# Altium PCB main_old.PcbDoc (part 4 of 15)
Units mil, origin at the board's own origin, x right, y up, seen from the top; angles counter-clockwise.
Board outline 8394.55 x 5164.44 mil, 7 copper layers (Top Layer 1, Layer 2, Layer 3, Unused, Layer 4_pow, Layer 5_gnd, Bottom 6+gnd), stack 46.112 mil thick; 363 components, 409 nets, 1750 pads, 991 vias.
Unrouted connection lines stored in the file: 1.
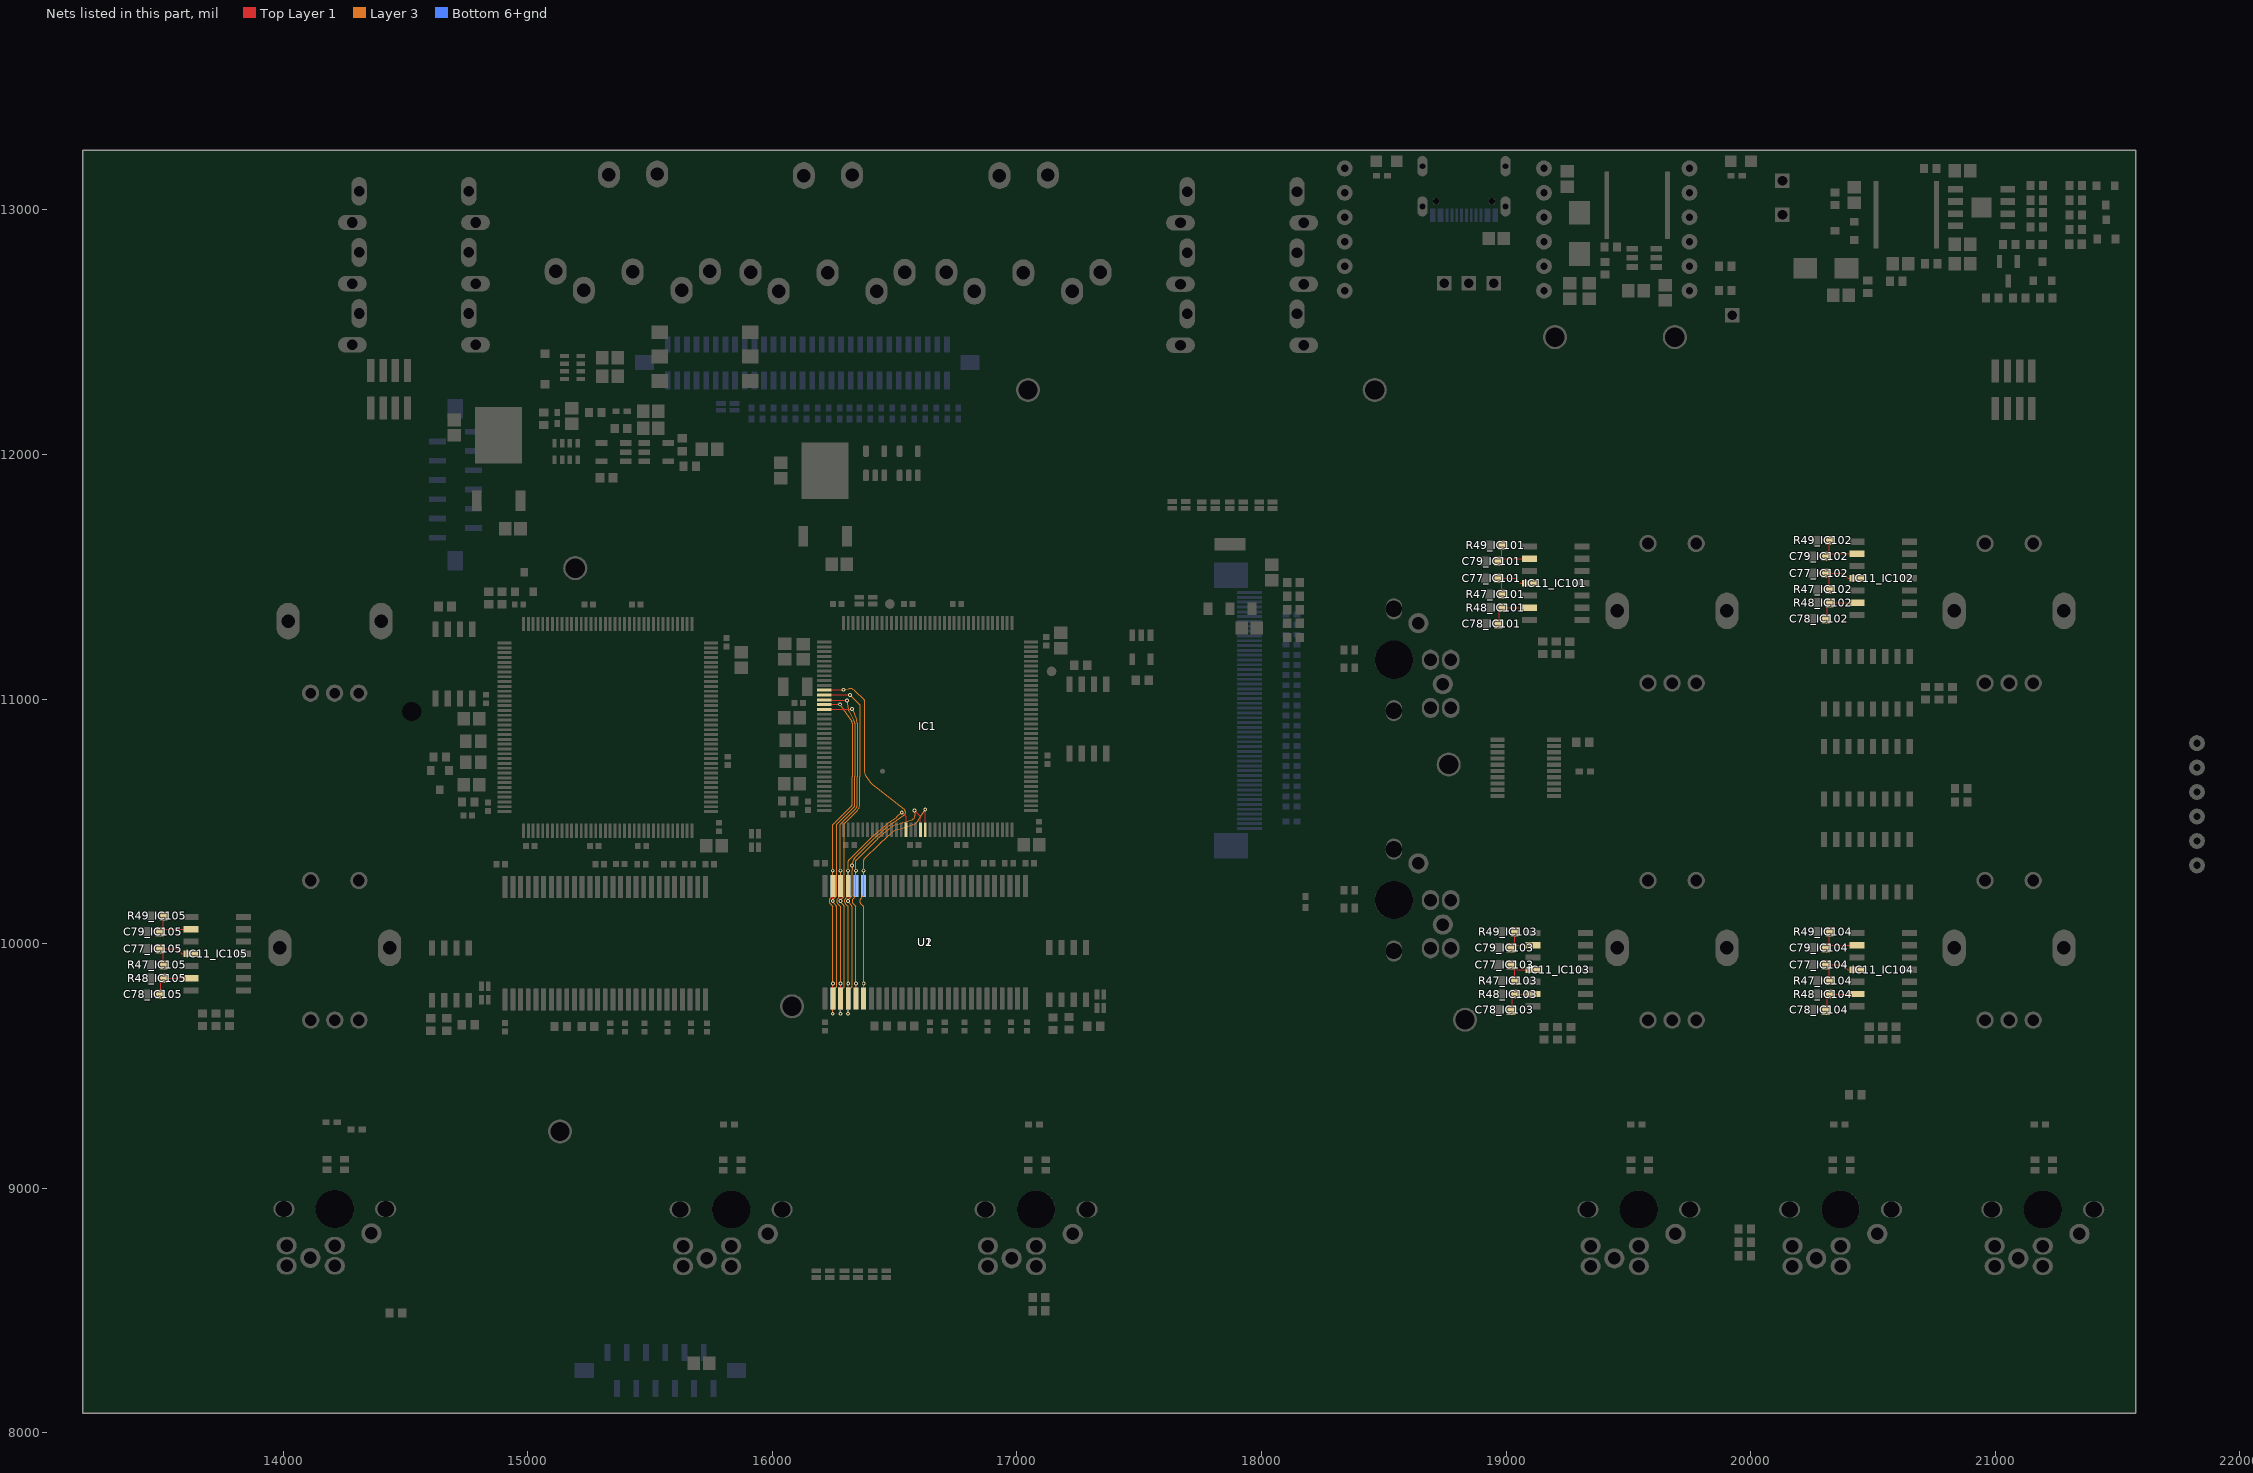
[diagram p7: the nets of this part, all layers, seen from the top]

## Via types
v1: diameter 15.75, hole 7.87, Top Layer 1 to Bottom 6+gnd, tented both sides, 923 vias
v2: diameter 27.56, hole 11.81, Top Layer 1 to Bottom 6+gnd, 45 vias
v3: diameter 23.62/23.62/23.62/23.62/23.62/23.62/23.62 (per signal layer), hole 12, Top Layer 1 to Bottom 6+gnd, tented top, 10 vias
v4: diameter 15.75, hole 7.87, Top Layer 1 to Bottom 6+gnd, 10 vias
v5: diameter 23.62/23.62/23.62/23.62/23.62/23.62/23.62 (per signal layer), hole 12, Top Layer 1 to Bottom 6+gnd, tented bottom, 3 vias

## Nets (pads, with @x,y where several pads share a name; then routed paths per layer and width w, separated by ;. In a path a pad name is that pad's centre, name@x,y a point inside that pad or via, vN(x,y) a via of type N, cw(c..) or ccw(c..) an arc to the next point about the centre after c; other vN are vias at no path point) (continued)
A1: IC1.11 U1.24 U2.24 | length 2953.5
  Top Layer 1 w5: IC1.11@16212.4,11036.61 16213.06,11037.27 16289.38,11037.27 v1(16290.2,11038.08) ; v1(16309.79,10174.13) U1.24@16309.79,10235.97
  Layer 3 w5: v1(16290.2,11038.08) 16312.52,11042.16 ; v1(16309.79,9713.5) 16309.79,9805.11 cw(c16314.8,9805.12) 16311.24,9808.63 16324.46,9821.89 ; v1(16309.79,10174.13) ccw(c16313.95,10176.92) 16309.88,10174.01 16324.99,10152.83 ; v1@16309.79,10179.83 16309.79,10179.7 cw(c16313.95,10176.92) 16310.38,10180.41 16324.46,10194.54 ; v1(16325.63,10320.11) 16325.92,10302.31 ; 16325.92,9825.38 16325.92,10149.97 ; 16335.67,10348.82 ccw(c16346.29,10338.23) 16331.89,10342.41 v1@16325.83,10321.55 ; 16335.68,10348.83 16419.34,10432.49 ; 16376.44,10994.71 16376.47,10700.78 ; 16312.52,11042.16 cw(c16317.09,11017.2) 16334.32,11035.83 ; 16312.52,11042.16 cw(c16317.09,11017.2) 16334.32,11035.83 ; 16312.52,11042.16 cw(c16317.09,11017.2) 16334.32,11035.83 ; 16312.52,11042.16 cw(c16317.09,11017.2) 16334.32,11035.83 ; 16312.52,11042.16 cw(c16317.09,11017.2) 16334.32,11035.83 ; 16324.46,9821.89 ccw(c16320.92,9825.42) 16325.92,9825.33 ; 16324.46,9821.89 ccw(c16320.92,9825.42) 16325.92,9825.33 ; 16324.46,9821.89 ccw(c16320.92,9825.42) 16325.92,9825.33 ; 16324.46,9821.89 ccw(c16320.92,9825.42) 16325.92,9825.33 ; 16324.46,9821.89 ccw(c16320.92,9825.42) 16325.92,9825.33 ; 16324.46,9821.89 ccw(c16320.92,9825.42) 16325.92,9825.33 ; 16324.46,9821.89 ccw(c16320.92,9825.42) 16325.92,9825.33 ; 16324.46,9821.89 ccw(c16320.92,9825.42) 16325.92,9825.33 ; 16324.46,9821.89 ccw(c16320.92,9825.42) 16325.92,9825.33 ; 16324.46,9821.89 ccw(c16320.92,9825.42) 16325.92,9825.33 ; 16324.46,9821.89 ccw(c16320.92,9825.42) 16325.92,9825.33 ; 16324.46,9821.89 ccw(c16320.92,9825.42) 16325.92,9825.33 ; 16324.46,9821.89 ccw(c16320.92,9825.42) 16325.92,9825.33 ; 16324.46,9821.89 ccw(c16320.92,9825.42) 16325.92,9825.33 ; 16324.46,9821.89 ccw(c16320.92,9825.42) 16325.92,9825.33 ; 16324.46,9821.89 ccw(c16320.92,9825.42) 16325.92,9825.33 ; 16324.46,10194.54 ccw(c16320.92,10198.07) 16325.92,10197.98 ; 16324.46,10194.54 ccw(c16320.92,10198.07) 16325.92,10197.98 ; 16324.46,10194.54 ccw(c16320.92,10198.07) 16325.92,10197.98 ; 16324.46,10194.54 ccw(c16320.92,10198.07) 16325.92,10197.98 ; 16324.46,10194.54 ccw(c16320.92,10198.07) 16325.92,10197.98 ; 16324.46,10194.54 ccw(c16320.92,10198.07) 16325.92,10197.98 ; 16324.46,10194.54 ccw(c16320.92,10198.07) 16325.92,10197.98 ; 16324.46,10194.54 ccw(c16320.92,10198.07) 16325.92,10197.98 ; 16324.46,10194.54 ccw(c16320.92,10198.07) 16325.92,10197.98 ; 16324.46,10194.54 ccw(c16320.92,10198.07) 16325.92,10197.98 ; 16324.46,10194.54 ccw(c16320.92,10198.07) 16325.92,10197.98 ; 16324.46,10194.54 ccw(c16320.92,10198.07) 16325.92,10197.98 ; 16324.46,10194.54 ccw(c16320.92,10198.07) 16325.92,10197.98 ; 16324.46,10194.54 ccw(c16320.92,10198.07) 16325.92,10197.98 ; 16324.46,10194.54 ccw(c16320.92,10198.07) 16325.92,10197.98 ; 16324.46,10194.54 ccw(c16320.92,10198.07) 16325.92,10197.98 ; 16324.99,10152.83 cw(c16320.92,10149.93) 16325.92,10150.02 ; 16324.99,10152.83 cw(c16320.92,10149.93) 16325.92,10150.02 ; 16324.99,10152.83 cw(c16320.92,10149.93) 16325.92,10150.02 ; 16324.99,10152.83 cw(c16320.92,10149.93) 16325.92,10150.02 ; 16324.99,10152.83 cw(c16320.92,10149.93) 16325.92,10150.02 ; 16324.99,10152.83 cw(c16320.92,10149.93) 16325.92,10150.02 ; 16324.99,10152.83 cw(c16320.92,10149.93) 16325.92,10150.02 ; 16324.99,10152.83 cw(c16320.92,10149.93) 16325.92,10150.02 ; 16324.99,10152.83 cw(c16320.92,10149.93) 16325.92,10150.02 ; 16324.99,10152.83 cw(c16320.92,10149.93) 16325.92,10150.02 ; 16324.99,10152.83 cw(c16320.92,10149.93) 16325.92,10150.02 ; 16324.99,10152.83 cw(c16320.92,10149.93) 16325.92,10150.02 ; 16324.99,10152.83 cw(c16320.92,10149.93) 16325.92,10150.02 ; 16324.99,10152.83 cw(c16320.92,10149.93) 16325.92,10150.02 ; 16324.99,10152.83 cw(c16320.92,10149.93) 16325.92,10150.02 ; 16324.99,10152.83 cw(c16320.92,10149.93) 16325.92,10150.02 ; v1@16325.63,10320.15 cw(c16330.63,10320.15) 16325.82,10321.54 ccw(c16330.63,10320.15) v1@16325.63,10320.15 ; v1@16325.63,10320.15 cw(c16330.63,10320.15) v1@16325.83,10321.55 ; v1@16325.63,10320.15 cw(c16330.63,10320.15) v1@16325.83,10321.55 ; v1@16325.63,10320.15 cw(c16330.63,10320.15) v1@16325.83,10321.55 ; v1@16325.63,10320.15 cw(c16330.63,10320.15) v1@16325.83,10321.55 ; v1@16325.63,10320.15 cw(c16330.63,10320.15) v1@16325.83,10321.55 ; v1@16325.63,10320.15 cw(c16330.63,10320.15) v1@16325.83,10321.55 ; v1@16325.63,10320.15 cw(c16330.63,10320.15) v1@16325.83,10321.55 ; v1@16325.63,10320.15 cw(c16330.63,10320.15) v1@16325.83,10321.55 ; 16325.92,10197.98 16325.92,10302.24 ; 16325.92,10302.25 ccw(c16320.92,10302.23) 16325.92,10302.31 ; 16325.92,10302.25 ccw(c16320.92,10302.23) 16325.92,10302.31 ; 16325.92,10302.25 ccw(c16320.92,10302.23) 16325.92,10302.31 ; 16325.92,10302.25 ccw(c16320.92,10302.23) 16325.92,10302.31 ; 16325.92,10302.25 ccw(c16320.92,10302.23) 16325.92,10302.31 ; 16334.32,11035.83 16374.84,10998.34 ; 16374.84,10998.34 cw(c16371.44,10994.67) 16376.44,10994.76 ; 16374.84,10998.34 cw(c16371.44,10994.67) 16376.44,10994.76 ; 16374.84,10998.34 cw(c16371.44,10994.67) 16376.44,10994.76 ; 16374.84,10998.34 cw(c16371.44,10994.67) 16376.44,10994.76 ; 16374.84,10998.34 cw(c16371.44,10994.67) 16376.44,10994.76 ; 16374.84,10998.34 cw(c16371.44,10994.67) 16376.44,10994.76 ; 16374.84,10998.34 cw(c16371.44,10994.67) 16376.44,10994.76 ; 16374.84,10998.34 cw(c16371.44,10994.67) 16376.44,10994.76 ; 16374.84,10998.34 cw(c16371.44,10994.67) 16376.44,10994.76 ; 16374.84,10998.34 cw(c16371.44,10994.67) 16376.44,10994.76 ; 16374.84,10998.34 cw(c16371.44,10994.67) 16376.44,10994.76 ; 16374.84,10998.34 cw(c16371.44,10994.67) 16376.44,10994.76 ; 16374.84,10998.34 cw(c16371.44,10994.67) 16376.44,10994.76 ; 16374.84,10998.34 cw(c16371.44,10994.67) 16376.44,10994.76 ; 16374.84,10998.34 cw(c16371.44,10994.67) 16376.44,10994.76 ; 16374.84,10998.34 cw(c16371.44,10994.67) 16376.44,10994.76 ; 16376.47,10700.78 ccw(c16401.84,10700.79) 16381.55,10685.56 ; 16376.47,10700.78 ccw(c16401.84,10700.79) 16381.55,10685.56 ; 16376.47,10700.78 ccw(c16401.84,10700.79) 16381.55,10685.56 ; 16376.47,10700.78 ccw(c16401.84,10700.79) 16381.55,10685.56 ; 16376.47,10700.78 ccw(c16401.84,10700.79) 16381.55,10685.56 ; 16376.47,10700.78 ccw(c16401.84,10700.79) 16381.55,10685.56 ; 16376.47,10700.78 ccw(c16401.84,10700.79) 16381.55,10685.56 ; 16376.47,10700.78 ccw(c16401.84,10700.79) 16381.55,10685.56 ; 16376.47,10700.78 ccw(c16401.84,10700.79) 16381.55,10685.56 ; 16376.47,10700.78 ccw(c16401.84,10700.79) 16381.55,10685.56 ; 16376.47,10700.78 ccw(c16401.84,10700.79) 16381.55,10685.56 ; 16376.47,10700.78 ccw(c16401.84,10700.79) 16381.55,10685.56 ; 16376.47,10700.78 ccw(c16401.84,10700.79) 16381.55,10685.56 ; 16376.47,10700.78 ccw(c16401.84,10700.79) 16381.55,10685.56 ; 16376.47,10700.78 ccw(c16401.84,10700.79) 16381.55,10685.56 ; 16376.47,10700.78 ccw(c16401.84,10700.79) 16381.55,10685.56 ; 16381.55,10685.56 16400.84,10659.9 ; 16400.84,10659.9 ccw(c16437.09,10687.2) 16408.9,10651.64 ; 16400.84,10659.9 ccw(c16437.09,10687.2) 16408.9,10651.64 ; 16400.84,10659.9 ccw(c16437.09,10687.2) 16408.9,10651.64 ; 16400.84,10659.9 ccw(c16437.09,10687.2) 16408.9,10651.64 ; 16400.84,10659.9 ccw(c16437.09,10687.2) 16408.9,10651.64 ; 16400.84,10659.9 ccw(c16437.09,10687.2) 16408.9,10651.64 ; 16400.84,10659.9 ccw(c16437.09,10687.2) 16408.9,10651.64 ; 16400.84,10659.9 ccw(c16437.09,10687.2) 16408.9,10651.64 ; 16400.84,10659.9 ccw(c16437.09,10687.2) 16408.9,10651.64 ; 16400.84,10659.9 ccw(c16437.09,10687.2) 16408.9,10651.64 ; 16400.84,10659.9 ccw(c16437.09,10687.2) 16408.9,10651.64 ; 16400.84,10659.9 ccw(c16437.09,10687.2) 16408.9,10651.64 ; 16400.84,10659.9 ccw(c16437.09,10687.2) 16408.9,10651.64 ; 16400.84,10659.9 ccw(c16437.09,10687.2) 16408.9,10651.64 ; 16400.84,10659.9 ccw(c16437.09,10687.2) 16408.9,10651.64 ; 16400.84,10659.9 ccw(c16437.09,10687.2) 16408.9,10651.64 ; 16408.9,10651.64 16538.57,10548.88 ; 16419.34,10432.49 cw(c16472.28,10379.36) 16422.72,10435.65 ; 16419.34,10432.49 cw(c16472.28,10379.36) 16422.72,10435.65 ; 16419.34,10432.49 cw(c16472.28,10379.36) 16422.72,10435.65 ; 16419.34,10432.49 cw(c16472.28,10379.36) 16422.72,10435.65 ; 16419.34,10432.49 cw(c16472.28,10379.36) 16422.72,10435.65 ; 16419.34,10432.49 cw(c16472.28,10379.36) 16422.72,10435.65 ; 16419.34,10432.49 cw(c16472.28,10379.36) 16422.72,10435.65 ; 16419.34,10432.49 cw(c16472.28,10379.36) 16422.72,10435.65 ; 16419.34,10432.49 cw(c16472.28,10379.36) 16422.72,10435.65 ; 16419.34,10432.49 cw(c16472.28,10379.36) 16422.72,10435.65 ; 16419.34,10432.49 cw(c16472.28,10379.36) 16422.72,10435.65 ; 16419.34,10432.49 cw(c16472.28,10379.36) 16422.72,10435.65 ; 16419.34,10432.49 cw(c16472.28,10379.36) 16422.72,10435.65 ; 16419.34,10432.49 cw(c16472.28,10379.36) 16422.72,10435.65 ; 16419.34,10432.49 cw(c16472.28,10379.36) 16422.72,10435.65 ; 16419.34,10432.49 cw(c16472.28,10379.36) 16422.72,10435.65 ; 16422.72,10435.65 16470.32,10477.63 ; 16470.32,10477.63 cw(c16526.79,10413.6) 16478.88,10484.26 ; 16470.32,10477.63 cw(c16526.79,10413.6) 16478.88,10484.26 ; 16470.32,10477.63 cw(c16526.79,10413.6) 16478.88,10484.26 ; 16470.32,10477.63 cw(c16526.79,10413.6) 16478.88,10484.26 ; 16470.32,10477.63 cw(c16526.79,10413.6) 16478.88,10484.26 ; 16470.32,10477.63 cw(c16526.79,10413.6) 16478.88,10484.26 ; 16470.32,10477.63 cw(c16526.79,10413.6) 16478.88,10484.26 ; 16470.32,10477.63 cw(c16526.79,10413.6) 16478.88,10484.26 ; 16470.32,10477.63 cw(c16526.79,10413.6) 16478.88,10484.26 ; 16470.32,10477.63 cw(c16526.79,10413.6) 16478.88,10484.26 ; 16470.32,10477.63 cw(c16526.79,10413.6) 16478.88,10484.26 ; 16470.32,10477.63 cw(c16526.79,10413.6) 16478.88,10484.26 ; 16470.32,10477.63 cw(c16526.79,10413.6) 16478.88,10484.26 ; 16470.32,10477.63 cw(c16526.79,10413.6) 16478.88,10484.26 ; 16470.32,10477.63 cw(c16526.79,10413.6) 16478.88,10484.26 ; 16470.32,10477.63 cw(c16526.79,10413.6) 16478.88,10484.26 ; 16478.88,10484.26 16537.65,10524.1 ; 16537.65,10524.1 ccw(c16529.02,10536.83) 16538.57,10548.88 ; 16537.65,10524.11 ccw(c16529.02,10536.83) 16538.57,10548.88 ; 16537.65,10524.11 ccw(c16529.02,10536.83) 16538.57,10548.88 ; 16537.65,10524.11 ccw(c16529.02,10536.83) 16538.57,10548.88 ; 16537.65,10524.11 ccw(c16529.02,10536.83) 16538.57,10548.88 ; 16537.65,10524.11 ccw(c16529.02,10536.83) 16538.57,10548.88 ; 16537.65,10524.11 ccw(c16529.02,10536.83) 16538.57,10548.88 ; 16537.65,10524.11 ccw(c16529.02,10536.83) 16538.57,10548.88
  Bottom 6+gnd w5: v1@16310.04,9713.75 U2.24@16310.04,9775.59
A2: IC1.12 U1.25 U2.25 | length 1805.6
  Top Layer 1 w5: IC1.12@16212.24,11016.77 16212.46,11016.99 16316.87,11016.99 v1(16317.09,11017.2) ; v1(16278.3,10174.13) U1.25@16278.3,10235.98
  Layer 3 w5: v1(16278.3,9713.5) 16278.3,9805.11 cw(c16283.3,9805.12) 16279.74,9808.63 16292.96,9821.89 ; v1(16278.3,10174.13) ccw(c16282.45,10176.92) 16278.39,10174.01 16293.49,10152.83 ; v1@16278.3,10179.83 16278.3,10179.7 cw(c16282.45,10176.92) 16278.88,10180.41 16292.96,10194.54 ; 16294.42,9825.38 16294.42,10150.02 ; v1(16317.09,11017.2) 16354.88,10979.41 ; 16354.96,10979.32 cw(c16351.34,10975.88) 16356.34,10975.88 16356.39,10682.14 cw(c16346.39,10682.09) 16356.39,10682.07 16356.36,10564.01 cw(c16331.36,10564.02) 16349.09,10546.4 16295.87,10493.17 ; 16292.96,9821.89 ccw(c16289.42,9825.42) 16294.42,9825.33 ; 16292.96,9821.89 ccw(c16289.42,9825.42) 16294.42,9825.33 ; 16292.96,9821.89 ccw(c16289.42,9825.42) 16294.42,9825.33 ; 16292.96,9821.89 ccw(c16289.42,9825.42) 16294.42,9825.33 ; 16292.96,9821.89 ccw(c16289.42,9825.42) 16294.42,9825.33 ; 16292.96,9821.89 ccw(c16289.42,9825.42) 16294.42,9825.33 ; 16292.96,9821.89 ccw(c16289.42,9825.42) 16294.42,9825.33 ; 16292.96,9821.89 ccw(c16289.42,9825.42) 16294.42,9825.33 ; 16292.96,9821.89 ccw(c16289.42,9825.42) 16294.42,9825.33 ; 16292.96,9821.89 ccw(c16289.42,9825.42) 16294.42,9825.33 ; 16292.96,9821.89 ccw(c16289.42,9825.42) 16294.42,9825.33 ; 16292.96,9821.89 ccw(c16289.42,9825.42) 16294.42,9825.33 ; 16292.96,9821.89 ccw(c16289.42,9825.42) 16294.42,9825.33 ; 16292.96,9821.89 ccw(c16289.42,9825.42) 16294.42,9825.33 ; 16292.96,9821.89 ccw(c16289.42,9825.42) 16294.42,9825.33 ; 16292.96,9821.89 ccw(c16289.42,9825.42) 16294.42,9825.33 ; 16292.96,10194.54 ccw(c16289.42,10198.07) 16294.42,10197.98 ; 16292.96,10194.54 ccw(c16289.42,10198.07) 16294.42,10197.98 ; 16292.96,10194.54 ccw(c16289.42,10198.07) 16294.42,10197.98 ; 16292.96,10194.54 ccw(c16289.42,10198.07) 16294.42,10197.98 ; 16292.96,10194.54 ccw(c16289.42,10198.07) 16294.42,10197.98 ; 16292.96,10194.54 ccw(c16289.42,10198.07) 16294.42,10197.98 ; 16292.96,10194.54 ccw(c16289.42,10198.07) 16294.42,10197.98 ; 16292.96,10194.54 ccw(c16289.42,10198.07) 16294.42,10197.98 ; 16292.96,10194.54 ccw(c16289.42,10198.07) 16294.42,10197.98 ; 16292.96,10194.54 ccw(c16289.42,10198.07) 16294.42,10197.98 ; 16292.96,10194.54 ccw(c16289.42,10198.07) 16294.42,10197.98 ; 16292.96,10194.54 ccw(c16289.42,10198.07) 16294.42,10197.98 ; 16292.96,10194.54 ccw(c16289.42,10198.07) 16294.42,10197.98 ; 16292.96,10194.54 ccw(c16289.42,10198.07) 16294.42,10197.98 ; 16292.96,10194.54 ccw(c16289.42,10198.07) 16294.42,10197.98 ; 16292.96,10194.54 ccw(c16289.42,10198.07) 16294.42,10197.98 ; 16293.49,10152.83 cw(c16289.42,10149.93) 16294.42,10150.02 ; 16293.49,10152.83 cw(c16289.42,10149.93) 16294.42,10150.02 ; 16293.49,10152.83 cw(c16289.42,10149.93) 16294.42,10150.02 ; 16293.49,10152.83 cw(c16289.42,10149.93) 16294.42,10150.02 ; 16293.49,10152.83 cw(c16289.42,10149.93) 16294.42,10150.02 ; 16293.49,10152.83 cw(c16289.42,10149.93) 16294.42,10150.02 ; 16293.49,10152.83 cw(c16289.42,10149.93) 16294.42,10150.02 ; 16293.49,10152.83 cw(c16289.42,10149.93) 16294.42,10150.02 ; 16293.49,10152.83 cw(c16289.42,10149.93) 16294.42,10150.02 ; 16293.49,10152.83 cw(c16289.42,10149.93) 16294.42,10150.02 ; 16293.49,10152.83 cw(c16289.42,10149.93) 16294.42,10150.02 ; 16293.49,10152.83 cw(c16289.42,10149.93) 16294.42,10150.02 ; 16293.49,10152.83 cw(c16289.42,10149.93) 16294.42,10150.02 ; 16293.49,10152.83 cw(c16289.42,10149.93) 16294.42,10150.02 ; 16293.49,10152.83 cw(c16289.42,10149.93) 16294.42,10150.02 ; 16293.49,10152.83 cw(c16289.42,10149.93) 16294.42,10150.02 ; 16294.42,10198.02 16294.42,10489.66 ; 16294.42,10489.66 cw(c16299.42,10489.66) 16295.87,10493.17 ; 16294.42,10489.66 cw(c16299.42,10489.66) 16295.87,10493.17 ; 16294.42,10489.66 cw(c16299.42,10489.66) 16295.87,10493.17 ; 16294.42,10489.66 cw(c16299.42,10489.66) 16295.87,10493.17 ; 16294.42,10489.66 cw(c16299.42,10489.66) 16295.87,10493.17 ; 16294.42,10489.66 cw(c16299.42,10489.66) 16295.87,10493.17 ; 16294.42,10489.66 cw(c16299.42,10489.66) 16295.87,10493.17 ; 16294.42,10489.66 cw(c16299.42,10489.66) 16295.87,10493.17 ; 16294.42,10489.66 cw(c16299.42,10489.66) 16295.87,10493.17 ; 16294.42,10489.66 cw(c16299.42,10489.66) 16295.87,10493.17 ; 16294.42,10489.66 cw(c16299.42,10489.66) 16295.87,10493.17 ; 16294.42,10489.66 cw(c16299.42,10489.66) 16295.87,10493.17 ; 16294.42,10489.66 cw(c16299.42,10489.66) 16295.87,10493.17 ; 16294.42,10489.66 cw(c16299.42,10489.66) 16295.87,10493.17 ; 16294.42,10489.66 cw(c16299.42,10489.66) 16295.87,10493.17 ; 16294.42,10489.66 cw(c16299.42,10489.66) 16295.87,10493.17 ; 16354.88,10979.41 cw(c16351.34,10975.88) 16354.93,10979.36 ; 16354.88,10979.41 cw(c16351.34,10975.88) 16354.93,10979.36 ; 16354.88,10979.41 cw(c16351.34,10975.88) 16354.93,10979.36 ; 16354.88,10979.41 cw(c16351.34,10975.88) 16354.93,10979.36 ; 16354.88,10979.41 cw(c16351.34,10975.88) 16354.93,10979.36 ; 16354.88,10979.41 cw(c16351.34,10975.88) 16354.93,10979.36 ; 16354.88,10979.41 cw(c16351.34,10975.88) 16354.93,10979.36 ; 16354.88,10979.41 cw(c16351.34,10975.88) 16354.93,10979.36 ; 16354.88,10979.41 cw(c16351.34,10975.88) 16354.93,10979.36 ; 16354.88,10979.41 cw(c16351.34,10975.88) 16354.93,10979.36 ; 16354.88,10979.41 cw(c16351.34,10975.88) 16354.93,10979.36 ; 16354.88,10979.41 cw(c16351.34,10975.88) 16354.93,10979.36 ; 16354.88,10979.41 cw(c16351.34,10975.88) 16354.93,10979.36 ; 16354.88,10979.41 cw(c16351.34,10975.88) 16354.93,10979.36 ; 16354.88,10979.41 cw(c16351.34,10975.88) 16354.93,10979.36 ; 16354.88,10979.41 cw(c16351.34,10975.88) 16354.93,10979.36
  Bottom 6+gnd w5: v1@16278.54,9713.75 U2.25@16278.54,9775.59
A3: IC1.13 U1.26 U2.26 | length 1741.8
  Top Layer 1 w5: IC1.13@16212.4,10997.24 16214.19,10995.45 16303.37,10995.45 v1(16305,10993.82) ; v1(16246.8,10174.13) U1.26@16246.8,10235.97
  Layer 3 w5: v1(16246.8,9713.5) 16246.8,9805.11 cw(c16251.8,9805.12) 16248.25,9808.63 16261.48,9821.86 ccw(c16257.92,9825.38) 16262.92,9825.38 16262.92,10149.97 ; v1(16246.8,10174.13) ccw(c16250.96,10176.92) 16246.89,10174.01 16262,10152.83 ; v1@16246.8,10179.83 16246.8,10179.7 cw(c16250.96,10176.92) 16247.38,10180.41 16261.47,10194.54 ; v1(16305,10993.82) 16310.4,10957.68 ; 16334.92,10560.51 16262.92,10488.52 16262.92,10198.02 ; 16336.39,10682.12 16336.34,10900.41 ccw(c16311.34,10900.41) 16333.47,10912.04 ; 16336.39,10682.13 cw(c16326.39,10682.06) 16336.38,10681.95 16336.36,10564.02 ; 16261.47,10194.54 ccw(c16257.92,10198.07) 16262.92,10197.98 ; 16261.47,10194.54 ccw(c16257.92,10198.07) 16262.92,10197.98 ; 16261.47,10194.54 ccw(c16257.92,10198.07) 16262.92,10197.98 ; 16261.47,10194.54 ccw(c16257.92,10198.07) 16262.92,10197.98 ; 16261.47,10194.54 ccw(c16257.92,10198.07) 16262.92,10197.98 ; 16261.47,10194.54 ccw(c16257.92,10198.07) 16262.92,10197.98 ; 16261.47,10194.54 ccw(c16257.92,10198.07) 16262.92,10197.98 ; 16261.47,10194.54 ccw(c16257.92,10198.07) 16262.92,10197.98 ; 16261.47,10194.54 ccw(c16257.92,10198.07) 16262.92,10197.98 ; 16261.47,10194.54 ccw(c16257.92,10198.07) 16262.92,10197.98 ; 16261.47,10194.54 ccw(c16257.92,10198.07) 16262.92,10197.98 ; 16261.47,10194.54 ccw(c16257.92,10198.07) 16262.92,10197.98 ; 16261.47,10194.54 ccw(c16257.92,10198.07) 16262.92,10197.98 ; 16261.47,10194.54 ccw(c16257.92,10198.07) 16262.92,10197.98 ; 16261.47,10194.54 ccw(c16257.92,10198.07) 16262.92,10197.98 ; 16261.47,10194.54 ccw(c16257.92,10198.07) 16262.92,10197.98 ; 16262,10152.83 cw(c16257.92,10149.93) 16262.92,10150.02 ; 16262,10152.83 cw(c16257.92,10149.93) 16262.92,10150.02 ; 16262,10152.83 cw(c16257.92,10149.93) 16262.92,10150.02 ; 16262,10152.83 cw(c16257.92,10149.93) 16262.92,10150.02 ; 16262,10152.83 cw(c16257.92,10149.93) 16262.92,10150.02 ; 16262,10152.83 cw(c16257.92,10149.93) 16262.92,10150.02 ; 16262,10152.83 cw(c16257.92,10149.93) 16262.92,10150.02 ; 16262,10152.83 cw(c16257.92,10149.93) 16262.92,10150.02 ; 16262,10152.83 cw(c16257.92,10149.93) 16262.92,10150.02 ; 16262,10152.83 cw(c16257.92,10149.93) 16262.92,10150.02 ; 16262,10152.83 cw(c16257.92,10149.93) 16262.92,10150.02 ; 16262,10152.83 cw(c16257.92,10149.93) 16262.92,10150.02 ; 16262,10152.83 cw(c16257.92,10149.93) 16262.92,10150.02 ; 16262,10152.83 cw(c16257.92,10149.93) 16262.92,10150.02 ; 16262,10152.83 cw(c16257.92,10149.93) 16262.92,10150.02 ; 16262,10152.83 cw(c16257.92,10149.93) 16262.92,10150.02 ; 16310.4,10957.68 ccw(c16325.6,10959.98) 16311.97,10952.87 ; 16310.4,10957.68 ccw(c16325.6,10959.98) 16311.97,10952.87 ; 16310.4,10957.68 ccw(c16325.6,10959.98) 16311.97,10952.87 ; 16310.4,10957.68 ccw(c16325.6,10959.98) 16311.97,10952.87 ; 16310.4,10957.68 ccw(c16325.6,10959.98) 16311.97,10952.87 ; 16310.4,10957.68 ccw(c16325.6,10959.98) 16311.97,10952.87 ; 16310.4,10957.68 ccw(c16325.6,10959.98) 16311.97,10952.87 ; 16310.4,10957.68 ccw(c16325.6,10959.98) 16311.97,10952.87 ; 16310.4,10957.68 ccw(c16325.6,10959.98) 16311.97,10952.87 ; 16310.4,10957.68 ccw(c16325.6,10959.98) 16311.97,10952.87 ; 16310.4,10957.68 ccw(c16325.6,10959.98) 16311.97,10952.87 ; 16310.4,10957.68 ccw(c16325.6,10959.98) 16311.97,10952.87 ; 16310.4,10957.68 ccw(c16325.6,10959.98) 16311.97,10952.87 ; 16310.4,10957.68 ccw(c16325.6,10959.98) 16311.97,10952.87 ; 16310.4,10957.68 ccw(c16325.6,10959.98) 16311.97,10952.87 ; 16310.4,10957.68 ccw(c16325.6,10959.98) 16311.97,10952.87 ; 16311.97,10952.87 16333.43,10912.12 ; 16333.47,10912.04 ccw(c16311.34,10900.41) 16333.43,10912.12 ; 16333.47,10912.04 ccw(c16311.34,10900.41) 16333.43,10912.1 ; 16333.47,10912.04 ccw(c16311.34,10900.41) 16333.43,10912.1 ; 16333.47,10912.04 ccw(c16311.34,10900.41) 16333.43,10912.1 ; 16333.47,10912.04 ccw(c16311.34,10900.41) 16333.43,10912.1 ; 16334.94,10560.53 ccw(c16331.36,10564.02) 16336.36,10564.02 ; 16334.94,10560.53 ccw(c16331.36,10564.02) 16336.36,10564.02 ; 16334.94,10560.53 ccw(c16331.36,10564.02) 16336.36,10564.02 ; 16334.94,10560.53 ccw(c16331.36,10564.02) 16336.36,10564.02 ; 16334.94,10560.53 ccw(c16331.36,10564.02) 16336.36,10564.02
  Bottom 6+gnd w5: v1@16247.05,9713.75 U2.26@16247.05,9775.59
A3_IC101: C78_IC101.1 IC11_IC101.13 R48_IC101.2 | length 181.9
  Top Layer 1 w5: C78_IC101.1@18972.72,11308.82 18972.72,11363.82 R48_IC101.2@18982.72,11373.82 IC11_IC101.13@19095.43,11373.82
A3_IC102: C78_IC102.1 IC11_IC102.13 R48_IC102.2 | length 181.9
  Top Layer 1 w5: C78_IC102.1@20312.28,11328.82 20312.28,11383.82 R48_IC102.2@20322.28,11393.82 IC11_IC102.13@20435,11393.82
A3_IC103: C78_IC103.1 IC11_IC103.13 R48_IC103.2 | length 144.6
  Top Layer 1 w5: C78_IC103.1@19025,9728.82 19025,9783.82 R48_IC103.2@19035,9793.82 IC11_IC103.13@19110.43,9793.82
A3_IC104: C78_IC104.1 IC11_IC104.13 R48_IC104.2 | length 181.9
  Top Layer 1 w5: C78_IC104.1@20312.28,9728.82 20312.28,9783.82 R48_IC104.2@20322.28,9793.82 IC11_IC104.13@20435,9793.82
A3_IC105: C78_IC105.1 IC11_IC105.13 R48_IC105.2 | length 181.9
  Top Layer 1 w5: C78_IC105.1@13500,9793.82 13500,9848.82 R48_IC105.2@13510,9858.82 IC11_IC105.13@13622.72,9858.82
A4: IC1.14 U1.29 U2.29 | length 1865
  Top Layer 1 w5: IC1.14@16212.24,10977.4 16212.86,10978.02 16275.44,10978.02 v1(16276.06,10978.64) ; U1.29@16247.05,9775.59 16247.05,9837.43 v1(16247.29,9837.68) U1.29@16247.29,9775.83 ; U1.29@16247.54,9775.59 v1@16247.54,9837.43
  Layer 3 w5: v1(16247.29,9837.68) 16247.29,10149.83 ccw(c16242.29,10149.83) 16245.85,10153.35 16235.96,10163.23 ; v1(16276.06,10978.64) 16323.73,10908.87 cw(c16311.34,10900.41) 16326.34,10900.41 16326.39,10682.21 ; 16324.92,10564.65 16246.8,10486.54 v1(16246.8,10298.31) 16247.29,10297.82 16247.29,10199.75 cw(c16242.29,10199.75) 16246.04,10196.44 16235.3,10184.34 ; 16324.94,10564.68 ccw(c16321.36,10568.16) 16326.36,10568.16 16326.39,10681.96 ; 16235.3,10184.34 ccw(c16246.8,10174.13) 16235.96,10163.23 ; 16235.3,10184.34 ccw(c16246.8,10174.13) 16235.96,10163.23 ; 16235.3,10184.34 ccw(c16246.8,10174.13) 16235.96,10163.23 ; 16235.3,10184.34 ccw(c16246.8,10174.13) 16235.96,10163.23 ; 16235.3,10184.34 ccw(c16246.8,10174.13) 16235.96,10163.23 ; 16235.3,10184.34 ccw(c16246.8,10174.13) 16235.96,10163.23 ; 16235.3,10184.34 ccw(c16246.8,10174.13) 16235.96,10163.23 ; 16235.3,10184.34 ccw(c16246.8,10174.13) 16235.96,10163.23 ; 16235.3,10184.34 ccw(c16246.8,10174.13) 16235.96,10163.23 ; 16235.3,10184.34 ccw(c16246.8,10174.13) 16235.96,10163.23 ; 16235.3,10184.34 ccw(c16246.8,10174.13) 16235.96,10163.23 ; 16235.3,10184.34 ccw(c16246.8,10174.13) 16235.96,10163.23 ; 16235.3,10184.34 ccw(c16246.8,10174.13) 16235.96,10163.23 ; 16235.3,10184.34 ccw(c16246.8,10174.13) 16235.96,10163.23 ; 16235.3,10184.34 ccw(c16246.8,10174.13) 16235.96,10163.23 ; 16235.3,10184.34 ccw(c16246.8,10174.13) 16235.96,10163.23 ; 16326.39,10681.97 ccw(c16291.01,10682.09) 16326.39,10682.21 ; 16326.39,10681.97 ccw(c16291.01,10682.09) 16326.39,10682.21 ; 16326.39,10681.96 ccw(c16291.01,10682.09) 16326.39,10682.21 ; 16326.39,10681.97 ccw(c16291.01,10682.09) 16326.39,10682.21 ; 16326.39,10681.97 ccw(c16291.01,10682.09) 16326.39,10682.21 ; 16326.39,10681.97 ccw(c16291.01,10682.09) 16326.39,10682.21 ; 16326.39,10681.97 ccw(c16291.01,10682.09) 16326.39,10682.21 ; 16326.39,10681.97 ccw(c16291.01,10682.09) 16326.39,10682.21 ; 16326.39,10681.97 ccw(c16291.01,10682.09) 16326.39,10682.21 ; 16326.39,10681.97 ccw(c16291.01,10682.09) 16326.39,10682.21 ; 16326.39,10681.97 ccw(c16291.01,10682.09) 16326.39,10682.21 ; 16326.39,10681.97 ccw(c16291.01,10682.09) 16326.39,10682.21 ; 16326.39,10681.97 ccw(c16291.01,10682.09) 16326.39,10682.21 ; 16326.39,10681.97 ccw(c16291.01,10682.09) 16326.39,10682.21 ; 16326.39,10681.97 ccw(c16291.01,10682.09) 16326.39,10682.21 ; 16326.39,10681.97 ccw(c16291.01,10682.09) 16326.39,10682.21
  Bottom 6+gnd w5: U2.29@16247.05,10236.22 v1@16247.05,10298.06
A4_IC101: C77_IC101.1 IC11_IC101.11 R47_IC101.2 | length 200.1
  Top Layer 1 w5: R47_IC101.2@18982.72,11428.82 18982.72,11483.82 18972.72,11493.82 19038.26,11493.82 19058.26,11473.82 IC11_IC101.11@19095.43,11473.82
A4_IC102: C77_IC102.1 IC11_IC102.11 R47_IC102.2 | length 200.1
  Top Layer 1 w5: R47_IC102.2@20322.28,11448.82 20322.28,11503.82 20312.28,11513.82 20377.82,11513.82 20397.82,11493.82 IC11_IC102.11@20435,11493.82
A4_IC103: C77_IC103.1 IC11_IC103.11 R47_IC103.2 | length 162.9
  Top Layer 1 w5: R47_IC103.2@19035,9848.82 19035,9903.82 19025,9913.82 19045,9893.82 IC11_IC103.11@19110.43,9893.82
A4_IC104: C77_IC104.1 IC11_IC104.11 R47_IC104.2 | length 200.1
  Top Layer 1 w5: R47_IC104.2@20322.28,9848.82 20322.28,9903.82 20312.28,9913.82 20377.82,9913.82 20397.82,9893.82 IC11_IC104.11@20435,9893.82
A4_IC105: C77_IC105.1 IC11_IC105.11 R47_IC105.2 | length 200.1
  Top Layer 1 w5: R47_IC105.2@13510,9913.82 13510,9968.82 13500,9978.82 13565.54,9978.82 13585.54,9958.82 IC11_IC105.11@13622.72,9958.82
A5: IC1.15 U1.30 U2.30 | length 1571.9
  Top Layer 1 w5: IC1.15@16212.4,10957.87 16213.38,10958.85 16324.46,10958.85 v1(16325.6,10959.98) ; U1.30@16278.54,9775.59 v1@16278.54,9837.43
  Layer 3 w5: v1(16278.79,9837.68) 16278.79,10149.83 ; 16278.79,10199.75 16278.79,10297.82 v1(16278.3,10298.31) 16278.3,10487.68 ; v1(16325.6,10959.98) 16343.93,10913.17 cw(c16311.34,10900.41) 16346.34,10900.41 16346.39,10682.15 cw(c16326.39,10682.06) 16346.39,10681.99 ; 16277.33,10153.31 cw(c16273.79,10149.78) 16278.79,10149.87 ; 16277.33,10153.31 cw(c16273.79,10149.78) 16278.79,10149.87 ; 16277.33,10153.31 cw(c16273.79,10149.78) 16278.79,10149.87 ; 16277.33,10153.31 cw(c16273.79,10149.78) 16278.79,10149.87 ; 16277.33,10153.31 cw(c16273.79,10149.78) 16278.79,10149.87 ; 16277.33,10153.31 cw(c16273.79,10149.78) 16278.79,10149.87 ; 16277.33,10153.31 cw(c16273.79,10149.78) 16278.79,10149.87 ; 16277.33,10153.31 cw(c16273.79,10149.78) 16278.79,10149.87 ; 16277.33,10153.31 cw(c16273.79,10149.78) 16278.79,10149.87 ; 16277.33,10153.31 cw(c16273.79,10149.78) 16278.79,10149.87 ; 16277.33,10153.31 cw(c16273.79,10149.78) 16278.79,10149.87 ; 16277.33,10153.31 cw(c16273.79,10149.78) 16278.79,10149.87 ; 16277.33,10153.31 cw(c16273.79,10149.78) 16278.79,10149.87 ; 16277.33,10153.31 cw(c16273.79,10149.78) 16278.79,10149.87 ; 16277.33,10153.31 cw(c16273.79,10149.78) 16278.79,10149.87 ; 16277.33,10153.31 cw(c16273.79,10149.78) 16278.79,10149.87 ; 16277.33,10153.31 16267.4,10163.28 cw(c16278.3,10174.13) 16266.78,10184.31 16277.53,10196.48 ; 16277.53,10196.48 ccw(c16273.79,10199.79) 16278.79,10199.7 ; 16277.53,10196.48 ccw(c16273.79,10199.79) 16278.79,10199.7 ; 16277.53,10196.48 ccw(c16273.79,10199.79) 16278.79,10199.7 ; 16277.53,10196.48 ccw(c16273.79,10199.79) 16278.79,10199.7 ; 16277.53,10196.48 ccw(c16273.79,10199.79) 16278.79,10199.7 ; 16277.53,10196.48 ccw(c16273.79,10199.79) 16278.79,10199.7 ; 16277.53,10196.48 ccw(c16273.79,10199.79) 16278.79,10199.7 ; 16277.53,10196.48 ccw(c16273.79,10199.79) 16278.79,10199.7 ; 16277.53,10196.48 ccw(c16273.79,10199.79) 16278.79,10199.7 ; 16277.53,10196.48 ccw(c16273.79,10199.79) 16278.79,10199.7 ; 16277.53,10196.48 ccw(c16273.79,10199.79) 16278.79,10199.7 ; 16277.53,10196.48 ccw(c16273.79,10199.79) 16278.79,10199.7 ; 16277.53,10196.48 ccw(c16273.79,10199.79) 16278.79,10199.7 ; 16277.53,10196.48 ccw(c16273.79,10199.79) 16278.79,10199.7 ; 16277.53,10196.48 ccw(c16273.79,10199.79) 16278.79,10199.7 ; 16277.53,10196.48 ccw(c16273.79,10199.79) 16278.79,10199.7 ; 16278.3,10487.68 cw(c16283.3,10487.68) 16279.74,10491.19 ; 16278.3,10487.68 cw(c16283.3,10487.68) 16279.74,10491.19 ; 16278.3,10487.68 cw(c16283.3,10487.68) 16279.74,10491.19 ; 16278.3,10487.68 cw(c16283.3,10487.68) 16279.74,10491.19 ; 16278.3,10487.68 cw(c16283.3,10487.68) 16279.74,10491.19 ; 16278.3,10487.68 cw(c16283.3,10487.68) 16279.74,10491.19 ; 16278.3,10487.68 cw(c16283.3,10487.68) 16279.74,10491.19 ; 16278.3,10487.68 cw(c16283.3,10487.68) 16279.74,10491.19 ; 16278.3,10487.68 cw(c16283.3,10487.68) 16279.74,10491.19 ; 16278.3,10487.68 cw(c16283.3,10487.68) 16279.74,10491.19 ; 16278.3,10487.68 cw(c16283.3,10487.68) 16279.74,10491.19 ; 16278.3,10487.68 cw(c16283.3,10487.68) 16279.74,10491.19 ; 16278.3,10487.68 cw(c16283.3,10487.68) 16279.74,10491.19 ; 16278.3,10487.68 cw(c16283.3,10487.68) 16279.74,10491.19 ; 16278.3,10487.68 cw(c16283.3,10487.68) 16279.74,10491.19 ; 16278.3,10487.68 cw(c16283.3,10487.68) 16279.74,10491.19 ; 16279.74,10491.19 16342.01,10553.46 ccw(c16331.36,10564.02) 16346.36,10564.06 16346.39,10681.99 ; 16346.39,10682 ccw(c16326.39,10682.06) 16346.39,10682.12 ; 16346.39,10682 ccw(c16326.39,10682.06) 16346.39,10682.12 ; 16346.39,10682 ccw(c16326.39,10682.06) 16346.39,10682.12 ; 16346.39,10682 ccw(c16326.39,10682.06) 16346.39,10682.12
  Bottom 6+gnd w5: U2.30@16278.54,10236.22 v1@16278.54,10298.06
A5_IC101: C79_IC101.1 IC11_IC101.9 R49_IC101.2 | length 181.9
  Top Layer 1 w5: C79_IC101.1@18972.72,11563.82 C79_IC101.1@18982.72,11573.82 ; R49_IC101.2@18982.72,11628.82 C79_IC101.1@18982.72,11573.82 ; IC11_IC101.9@19095.43,11573.82 C79_IC101.1@18982.72,11573.82
A5_IC102: C79_IC102.1 IC11_IC102.9 R49_IC102.2 | length 181.9
  Top Layer 1 w5: C79_IC102.1@20312.28,11583.82 C79_IC102.1@20322.28,11593.82 ; R49_IC102.2@20322.28,11648.82 C79_IC102.1@20322.28,11593.82 ; IC11_IC102.9@20435,11593.82 C79_IC102.1@20322.28,11593.82
A5_IC103: C79_IC103.1 IC11_IC103.9 R49_IC103.2 | length 130.4
  Top Layer 1 w5: R49_IC103.2@19035,10048.82 19035,9993.82 IC11_IC103.9@19110.43,9993.82
A5_IC104: C79_IC104.1 IC11_IC104.9 R49_IC104.2 | length 181.9
  Top Layer 1 w5: C79_IC104.1@20312.28,9983.82 C79_IC104.1@20322.28,9993.82 ; R49_IC104.2@20322.28,10048.82 C79_IC104.1@20322.28,9993.82 ; IC11_IC104.9@20435,9993.82 C79_IC104.1@20322.28,9993.82
A5_IC105: C79_IC105.1 IC11_IC105.9 R49_IC105.2 | length 181.9
  Top Layer 1 w5: C79_IC105.1@13500,10048.82 C79_IC105.1@13510,10058.82 ; R49_IC105.2@13510,10113.82 C79_IC105.1@13510,10058.82 ; IC11_IC105.9@13622.72,10058.82 C79_IC105.1@13510,10058.82
A6: IC1.50 U1.31 U2.31 | length 1521.3
  Top Layer 1 w5: U1.31@16310.04,9775.59 v1@16310.04,9837.43 ; U1.31@16310.28,9775.83 v1(16310.28,9837.68) ; U1.31@16310.53,9775.59 v1@16310.53,9837.43 ; v1(16529.02,10536.83) 16546.57,10519.27 IC1.50@16546.57,10465.9
  Layer 3 w5: v1(16310.28,9837.68) 16310.28,10149.83 ; 16310.28,10199.75 16310.28,10297.82 v1(16309.79,10298.31) 16309.79,10337.87 ; 16470.54,10490.63 ccw(c16526.79,10413.6) 16463.71,10485.14 ; v1(16529.02,10536.83) 16508.9,10518.73 ; 16308.83,10153.31 cw(c16305.28,10149.78) 16310.28,10149.87 ; 16308.83,10153.31 cw(c16305.28,10149.78) 16310.28,10149.87 ; 16308.83,10153.31 cw(c16305.28,10149.78) 16310.28,10149.87 ; 16308.83,10153.31 cw(c16305.28,10149.78) 16310.28,10149.87 ; 16308.83,10153.31 cw(c16305.28,10149.78) 16310.28,10149.87 ; 16308.83,10153.31 cw(c16305.28,10149.78) 16310.28,10149.87 ; 16308.83,10153.31 cw(c16305.28,10149.78) 16310.28,10149.87 ; 16308.83,10153.31 cw(c16305.28,10149.78) 16310.28,10149.87 ; 16308.83,10153.31 cw(c16305.28,10149.78) 16310.28,10149.87 ; 16308.83,10153.31 cw(c16305.28,10149.78) 16310.28,10149.87 ; 16308.83,10153.31 cw(c16305.28,10149.78) 16310.28,10149.87 ; 16308.83,10153.31 cw(c16305.28,10149.78) 16310.28,10149.87 ; 16308.83,10153.31 cw(c16305.28,10149.78) 16310.28,10149.87 ; 16308.83,10153.31 cw(c16305.28,10149.78) 16310.28,10149.87 ; 16308.83,10153.31 cw(c16305.28,10149.78) 16310.28,10149.87 ; 16308.83,10153.31 cw(c16305.28,10149.78) 16310.28,10149.87 ; 16308.83,10153.31 16298.9,10163.28 cw(c16309.79,10174.13) 16298.27,10184.31 16309.03,10196.48 ; 16309.03,10196.48 ccw(c16305.28,10199.79) 16310.28,10199.7 ; 16309.03,10196.48 ccw(c16305.28,10199.79) 16310.28,10199.7 ; 16309.03,10196.48 ccw(c16305.28,10199.79) 16310.28,10199.7 ; 16309.03,10196.48 ccw(c16305.28,10199.79) 16310.28,10199.7 ; 16309.03,10196.48 ccw(c16305.28,10199.79) 16310.28,10199.7 ; 16309.03,10196.48 ccw(c16305.28,10199.79) 16310.28,10199.7 ; 16309.03,10196.48 ccw(c16305.28,10199.79) 16310.28,10199.7 ; 16309.03,10196.48 ccw(c16305.28,10199.79) 16310.28,10199.7 ; 16309.03,10196.48 ccw(c16305.28,10199.79) 16310.28,10199.7 ; 16309.03,10196.48 ccw(c16305.28,10199.79) 16310.28,10199.7 ; 16309.03,10196.48 ccw(c16305.28,10199.79) 16310.28,10199.7 ; 16309.03,10196.48 ccw(c16305.28,10199.79) 16310.28,10199.7 ; 16309.03,10196.48 ccw(c16305.28,10199.79) 16310.28,10199.7 ; 16309.03,10196.48 ccw(c16305.28,10199.79) 16310.28,10199.7 ; 16309.03,10196.48 ccw(c16305.28,10199.79) 16310.28,10199.7 ; 16309.03,10196.48 ccw(c16305.28,10199.79) 16310.28,10199.7 ; 16309.79,10337.87 cw(c16314.8,10337.87) 16311.31,10341.46 ; 16309.79,10337.87 cw(c16314.8,10337.87) 16311.31,10341.46 ; 16309.79,10337.87 cw(c16314.8,10337.87) 16311.31,10341.46 ; 16309.79,10337.87 cw(c16314.8,10337.87) 16311.31,10341.46 ; 16309.79,10337.87 cw(c16314.8,10337.87) 16311.31,10341.46 ; 16309.79,10337.87 cw(c16314.8,10337.87) 16311.31,10341.46 ; 16309.79,10337.87 cw(c16314.8,10337.87) 16311.31,10341.46 ; 16309.79,10337.87 cw(c16314.8,10337.87) 16311.31,10341.46 ; 16309.79,10337.87 cw(c16314.8,10337.87) 16311.31,10341.46 ; 16309.79,10337.87 cw(c16314.8,10337.87) 16311.31,10341.46 ; 16309.79,10337.87 cw(c16314.8,10337.87) 16311.31,10341.46 ; 16309.79,10337.87 cw(c16314.8,10337.87) 16311.31,10341.46 ; 16309.79,10337.87 cw(c16314.8,10337.87) 16311.31,10341.46 ; 16309.79,10337.87 cw(c16314.8,10337.87) 16311.31,10341.46 ; 16309.79,10337.87 cw(c16314.8,10337.87) 16311.31,10341.46 ; 16309.79,10337.87 cw(c16314.8,10337.87) 16311.31,10341.46 ; 16311.31,10341.46 16412.97,10440.25 ; 16412.97,10440.25 cw(c16472.28,10379.36) 16416.01,10443.07 ; 16412.97,10440.25 cw(c16472.28,10379.36) 16416.01,10443.07 ; 16412.97,10440.25 cw(c16472.28,10379.36) 16416.01,10443.07 ; 16412.97,10440.25 cw(c16472.28,10379.36) 16416.01,10443.07 ; 16412.97,10440.25 cw(c16472.28,10379.36) 16416.01,10443.07 ; 16412.97,10440.25 cw(c16472.28,10379.36) 16416.01,10443.07 ; 16412.97,10440.25 cw(c16472.28,10379.36) 16416.01,10443.07 ; 16412.97,10440.25 cw(c16472.28,10379.36) 16416.01,10443.07 ; 16412.97,10440.25 cw(c16472.28,10379.36) 16416.01,10443.07 ; 16412.97,10440.25 cw(c16472.28,10379.36) 16416.01,10443.07 ; 16412.97,10440.25 cw(c16472.28,10379.36) 16416.01,10443.07 ; 16412.97,10440.25 cw(c16472.28,10379.36) 16416.01,10443.07 ; 16412.97,10440.25 cw(c16472.28,10379.36) 16416.01,10443.07 ; 16412.97,10440.25 cw(c16472.28,10379.36) 16416.01,10443.07 ; 16412.97,10440.25 cw(c16472.28,10379.36) 16416.01,10443.07 ; 16412.97,10440.25 cw(c16472.28,10379.36) 16416.01,10443.07 ; 16416.01,10443.07 16463.71,10485.14 ; 16463.71,10485.14 cw(c16526.79,10413.6) 16470.54,10490.62 ; 16463.71,10485.14 cw(c16526.79,10413.6) 16470.54,10490.62 ; 16463.71,10485.14 cw(c16526.79,10413.6) 16470.54,10490.62 ; 16463.71,10485.14 cw(c16526.79,10413.6) 16470.54,10490.62 ; 16463.71,10485.14 cw(c16526.79,10413.6) 16470.54,10490.62 ; 16463.71,10485.14 cw(c16526.79,10413.6) 16470.54,10490.62 ; 16463.71,10485.14 cw(c16526.79,10413.6) 16470.54,10490.62 ; 16463.71,10485.14 cw(c16526.79,10413.6) 16470.54,10490.62 ; 16463.71,10485.14 cw(c16526.79,10413.6) 16470.54,10490.62 ; 16463.71,10485.14 cw(c16526.79,10413.6) 16470.54,10490.62 ; 16463.71,10485.14 cw(c16526.79,10413.6) 16470.54,10490.62 ; 16463.71,10485.14 cw(c16526.79,10413.6) 16470.54,10490.62 ; 16463.71,10485.14 cw(c16526.79,10413.6) 16470.54,10490.62 ; 16463.71,10485.14 cw(c16526.79,10413.6) 16470.54,10490.62 ; 16463.71,10485.14 cw(c16526.79,10413.6) 16470.54,10490.62 ; 16470.54,10490.62 16507.68,10517.74 ; 16507.68,10517.74 ccw(c16498.62,10530.16) 16508.9,10518.73 ; 16507.68,10517.74 ccw(c16498.62,10530.16) 16508.9,10518.73 ; 16507.68,10517.74 ccw(c16498.62,10530.16) 16508.9,10518.73 ; 16507.68,10517.74 ccw(c16498.62,10530.16) 16508.9,10518.73 ; 16507.68,10517.74 ccw(c16498.62,10530.16) 16508.9,10518.73 ; 16507.68,10517.74 ccw(c16498.62,10530.16) 16508.9,10518.73 ; 16507.68,10517.74 ccw(c16498.62,10530.16) 16508.9,10518.73 ; 16507.68,10517.74 ccw(c16498.62,10530.16) 16508.9,10518.73 ; 16507.68,10517.74 ccw(c16498.62,10530.16) 16508.9,10518.73 ; 16507.68,10517.74 ccw(c16498.62,10530.16) 16508.9,10518.73 ; 16507.68,10517.74 ccw(c16498.62,10530.16) 16508.9,10518.73 ; 16507.68,10517.74 ccw(c16498.62,10530.16) 16508.9,10518.73 ; 16507.68,10517.74 ccw(c16498.62,10530.16) 16508.9,10518.73 ; 16507.68,10517.74 ccw(c16498.62,10530.16) 16508.9,10518.73 ; 16507.68,10517.74 ccw(c16498.62,10530.16) 16508.9,10518.73 ; 16507.68,10517.74 ccw(c16498.62,10530.16) 16508.9,10518.73
  Bottom 6+gnd w5: U2.31@16310.04,10236.22 v1@16310.04,10298.06
A7: IC1.53 U1.32 U2.32 | length 1662.2
  Top Layer 1 w5: U1.32@16341.54,9775.59 v1@16341.54,9837.43 ; U1.32@16341.78,9775.83 v1(16341.78,9837.68) ; U1.32@16342.03,9775.59 v1@16342.03,9837.43 ; v1(16580.47,10545.15) 16605.24,10520.38 16605.24,10466.3 IC1.53@16605.47,10466.06
  Layer 3 w5: v1(16341.78,9837.68) 16341.78,10149.83 ; 16341.78,10199.75 16341.78,10297.82 v1(16341.29,10298.31) 16341.29,10338.23 ; v1(16580.47,10545.15) 16582.4,10523.57 ; 16340.32,10153.31 cw(c16336.78,10149.78) 16341.78,10149.87 ; 16340.32,10153.31 cw(c16336.78,10149.78) 16341.78,10149.87 ; 16340.32,10153.31 cw(c16336.78,10149.78) 16341.78,10149.87 ; 16340.32,10153.31 cw(c16336.78,10149.78) 16341.78,10149.87 ; 16340.32,10153.31 cw(c16336.78,10149.78) 16341.78,10149.87 ; 16340.32,10153.31 cw(c16336.78,10149.78) 16341.78,10149.87 ; 16340.32,10153.31 cw(c16336.78,10149.78) 16341.78,10149.87 ; 16340.32,10153.31 cw(c16336.78,10149.78) 16341.78,10149.87 ; 16340.32,10153.31 cw(c16336.78,10149.78) 16341.78,10149.87 ; 16340.32,10153.31 cw(c16336.78,10149.78) 16341.78,10149.87 ; 16340.32,10153.31 cw(c16336.78,10149.78) 16341.78,10149.87 ; 16340.32,10153.31 cw(c16336.78,10149.78) 16341.78,10149.87 ; 16340.32,10153.31 cw(c16336.78,10149.78) 16341.78,10149.87 ; 16340.32,10153.31 cw(c16336.78,10149.78) 16341.78,10149.87 ; 16340.32,10153.31 cw(c16336.78,10149.78) 16341.78,10149.87 ; 16340.32,10153.31 cw(c16336.78,10149.78) 16341.78,10149.87 ; 16340.32,10153.31 16330.4,10163.28 cw(c16341.29,10174.13) 16329.77,10184.31 16340.53,10196.48 ; 16340.53,10196.48 ccw(c16336.78,10199.79) 16341.78,10199.7 ; 16340.53,10196.48 ccw(c16336.78,10199.79) 16341.78,10199.7 ; 16340.53,10196.48 ccw(c16336.78,10199.79) 16341.78,10199.7 ; 16340.53,10196.48 ccw(c16336.78,10199.79) 16341.78,10199.7 ; 16340.53,10196.48 ccw(c16336.78,10199.79) 16341.78,10199.7 ; 16340.53,10196.48 ccw(c16336.78,10199.79) 16341.78,10199.7 ; 16340.53,10196.48 ccw(c16336.78,10199.79) 16341.78,10199.7 ; 16340.53,10196.48 ccw(c16336.78,10199.79) 16341.78,10199.7 ; 16340.53,10196.48 ccw(c16336.78,10199.79) 16341.78,10199.7 ; 16340.53,10196.48 ccw(c16336.78,10199.79) 16341.78,10199.7 ; 16340.53,10196.48 ccw(c16336.78,10199.79) 16341.78,10199.7 ; 16340.53,10196.48 ccw(c16336.78,10199.79) 16341.78,10199.7 ; 16340.53,10196.48 ccw(c16336.78,10199.79) 16341.78,10199.7 ; 16340.53,10196.48 ccw(c16336.78,10199.79) 16341.78,10199.7 ; 16340.53,10196.48 ccw(c16336.78,10199.79) 16341.78,10199.7 ; 16340.53,10196.48 ccw(c16336.78,10199.79) 16341.78,10199.7 ; 16341.29,10338.23 cw(c16346.29,10338.23) 16342.74,10341.74 ; 16341.29,10338.23 cw(c16346.29,10338.23) 16342.74,10341.74 ; 16341.29,10338.23 cw(c16346.29,10338.23) 16342.74,10341.74 ; 16341.29,10338.23 cw(c16346.29,10338.23) 16342.74,10341.74 ; 16341.29,10338.23 cw(c16346.29,10338.23) 16342.74,10341.74 ; 16341.29,10338.23 cw(c16346.29,10338.23) 16342.74,10341.74 ; 16341.29,10338.23 cw(c16346.29,10338.23) 16342.74,10341.74 ; 16341.29,10338.23 cw(c16346.29,10338.23) 16342.74,10341.74 ; 16341.29,10338.23 cw(c16346.29,10338.23) 16342.74,10341.74 ; 16341.29,10338.23 cw(c16346.29,10338.23) 16342.74,10341.74 ; 16341.29,10338.23 cw(c16346.29,10338.23) 16342.74,10341.74 ; 16341.29,10338.23 cw(c16346.29,10338.23) 16342.74,10341.74 ; 16341.29,10338.23 cw(c16346.29,10338.23) 16342.74,10341.74 ; 16341.29,10338.23 cw(c16346.29,10338.23) 16342.74,10341.74 ; 16341.29,10338.23 cw(c16346.29,10338.23) 16342.74,10341.74 ; 16341.29,10338.23 cw(c16346.29,10338.23) 16342.74,10341.74 ; 16342.74,10341.74 16426.43,10425.44 cw(c16472.28,10379.36) 16429.28,10428.11 16476.94,10470.14 cw(c16526.79,10413.6) 16503.41,10485.25 16571.86,10507.59 ; 16571.86,10507.59 ccw(c16567.09,10522.2) 16582.4,10523.57 ; 16571.86,10507.59 ccw(c16567.09,10522.2) 16582.4,10523.57 ; 16571.86,10507.59 ccw(c16567.09,10522.2) 16582.4,10523.57 ; 16571.86,10507.59 ccw(c16567.09,10522.2) 16582.4,10523.57 ; 16571.86,10507.59 ccw(c16567.09,10522.2) 16582.4,10523.57 ; 16571.86,10507.59 ccw(c16567.09,10522.2) 16582.4,10523.57 ; 16571.86,10507.59 ccw(c16567.09,10522.2) 16582.4,10523.57 ; 16571.86,10507.59 ccw(c16567.09,10522.2) 16582.4,10523.57 ; 16571.86,10507.59 ccw(c16567.09,10522.2) 16582.4,10523.57 ; 16571.86,10507.59 ccw(c16567.09,10522.2) 16582.4,10523.57 ; 16571.86,10507.59 ccw(c16567.09,10522.2) 16582.4,10523.57 ; 16571.86,10507.59 ccw(c16567.09,10522.2) 16582.4,10523.57 ; 16571.86,10507.59 ccw(c16567.09,10522.2) 16582.4,10523.57 ; 16571.86,10507.59 ccw(c16567.09,10522.2) 16582.4,10523.57 ; 16571.86,10507.59 ccw(c16567.09,10522.2) 16582.4,10523.57 ; 16571.86,10507.59 ccw(c16567.09,10522.2) 16582.4,10523.57
  Bottom 6+gnd w5: U2.32@16341.54,10236.22 v1@16341.54,10298.06
A8: IC1.54 U1.33 U2.33 | length 1981.1
  Top Layer 1 w5: U1.33@16373.03,9775.59 v1@16373.03,9837.43 ; v1(16625,10548.82) 16625.08,10548.74 16625.08,10466.14 IC1.54@16625.16,10466.06
  Layer 3 w5: v1(16373.28,9837.68) 16373.28,10149.83 ; 16373.28,10199.75 16373.28,10297.82 v1(16372.79,10298.31) 16372.79,10341.44 ; 16578.06,10488.57 16509.71,10466.27 ; v1(16625,10548.82) 16597.21,10503.66 ; 16371.82,10153.31 cw(c16368.28,10149.78) 16373.28,10149.87 ; 16371.82,10153.31 cw(c16368.28,10149.78) 16373.28,10149.87 ; 16371.82,10153.31 cw(c16368.28,10149.78) 16373.28,10149.87 ; 16371.82,10153.31 cw(c16368.28,10149.78) 16373.28,10149.87 ; 16371.82,10153.31 cw(c16368.28,10149.78) 16373.28,10149.87 ; 16371.82,10153.31 cw(c16368.28,10149.78) 16373.28,10149.87 ; 16371.82,10153.31 cw(c16368.28,10149.78) 16373.28,10149.87 ; 16371.82,10153.31 cw(c16368.28,10149.78) 16373.28,10149.87 ; 16371.82,10153.31 cw(c16368.28,10149.78) 16373.28,10149.87 ; 16371.82,10153.31 cw(c16368.28,10149.78) 16373.28,10149.87 ; 16371.82,10153.31 cw(c16368.28,10149.78) 16373.28,10149.87 ; 16371.82,10153.31 cw(c16368.28,10149.78) 16373.28,10149.87 ; 16371.82,10153.31 cw(c16368.28,10149.78) 16373.28,10149.87 ; 16371.82,10153.31 cw(c16368.28,10149.78) 16373.28,10149.87 ; 16371.82,10153.31 cw(c16368.28,10149.78) 16373.28,10149.87 ; 16371.82,10153.31 cw(c16368.28,10149.78) 16373.28,10149.87 ; 16371.82,10153.31 16361.89,10163.28 cw(c16372.79,10174.13) 16361.26,10184.31 16372.02,10196.48 ; 16372.02,10196.48 ccw(c16368.28,10199.79) 16373.28,10199.7 ; 16372.02,10196.48 ccw(c16368.28,10199.79) 16373.28,10199.7 ; 16372.02,10196.48 ccw(c16368.28,10199.79) 16373.28,10199.7 ; 16372.02,10196.48 ccw(c16368.28,10199.79) 16373.28,10199.7 ; 16372.02,10196.48 ccw(c16368.28,10199.79) 16373.28,10199.7 ; 16372.02,10196.48 ccw(c16368.28,10199.79) 16373.28,10199.7 ; 16372.02,10196.48 ccw(c16368.28,10199.79) 16373.28,10199.7 ; 16372.02,10196.48 ccw(c16368.28,10199.79) 16373.28,10199.7 ; 16372.02,10196.48 ccw(c16368.28,10199.79) 16373.28,10199.7 ; 16372.02,10196.48 ccw(c16368.28,10199.79) 16373.28,10199.7 ; 16372.02,10196.48 ccw(c16368.28,10199.79) 16373.28,10199.7 ; 16372.02,10196.48 ccw(c16368.28,10199.79) 16373.28,10199.7 ; 16372.02,10196.48 ccw(c16368.28,10199.79) 16373.28,10199.7 ; 16372.02,10196.48 ccw(c16368.28,10199.79) 16373.28,10199.7 ; 16372.02,10196.48 ccw(c16368.28,10199.79) 16373.28,10199.7 ; 16372.02,10196.48 ccw(c16368.28,10199.79) 16373.28,10199.7 ; 16372.79,10341.44 cw(c16377.79,10341.44) 16374.23,10344.95 ; 16372.79,10341.44 cw(c16377.79,10341.44) 16374.23,10344.95 ; 16372.79,10341.44 cw(c16377.79,10341.44) 16374.23,10344.95 ; 16372.79,10341.44 cw(c16377.79,10341.44) 16374.23,10344.95 ; 16372.79,10341.44 cw(c16377.79,10341.44) 16374.23,10344.95 ; 16372.79,10341.44 cw(c16377.79,10341.44) 16374.23,10344.95 ; 16372.79,10341.44 cw(c16377.79,10341.44) 16374.23,10344.95 ; 16372.79,10341.44 cw(c16377.79,10341.44) 16374.23,10344.95 ; 16372.79,10341.44 cw(c16377.79,10341.44) 16374.23,10344.95 ; 16372.79,10341.44 cw(c16377.79,10341.44) 16374.23,10344.95 ; 16372.79,10341.44 cw(c16377.79,10341.44) 16374.23,10344.95 ; 16372.79,10341.44 cw(c16377.79,10341.44) 16374.23,10344.95 ; 16372.79,10341.44 cw(c16377.79,10341.44) 16374.23,10344.95 ; 16372.79,10341.44 cw(c16377.79,10341.44) 16374.23,10344.95 ; 16372.79,10341.44 cw(c16377.79,10341.44) 16374.23,10344.95 ; 16372.79,10341.44 cw(c16377.79,10341.44) 16374.23,10344.95 ; 16374.23,10344.95 16440.54,10411.26 ; 16440.54,10411.26 cw(c16472.28,10379.36) 16442.54,10413.14 ; 16440.54,10411.26 cw(c16472.28,10379.36) 16442.54,10413.14 ; 16440.54,10411.26 cw(c16472.28,10379.36) 16442.54,10413.14 ; 16440.54,10411.26 cw(c16472.28,10379.36) 16442.54,10413.14 ; 16440.54,10411.26 cw(c16472.28,10379.36) 16442.54,10413.14 ; 16440.54,10411.26 cw(c16472.28,10379.36) 16442.54,10413.14 ; 16440.54,10411.26 cw(c16472.28,10379.36) 16442.54,10413.14 ; 16440.54,10411.26 cw(c16472.28,10379.36) 16442.54,10413.14 ; 16440.54,10411.26 cw(c16472.28,10379.36) 16442.54,10413.14 ; 16440.54,10411.26 cw(c16472.28,10379.36) 16442.54,10413.14 ; 16440.54,10411.26 cw(c16472.28,10379.36) 16442.54,10413.14 ; 16440.54,10411.26 cw(c16472.28,10379.36) 16442.54,10413.14 ; 16440.54,10411.26 cw(c16472.28,10379.36) 16442.54,10413.14 ; 16440.54,10411.26 cw(c16472.28,10379.36) 16442.54,10413.14 ; 16440.54,10411.26 cw(c16472.28,10379.36) 16442.54,10413.14 ; 16440.54,10411.26 cw(c16472.28,10379.36) 16442.54,10413.14 ; 16442.54,10413.14 16490.17,10455.13 ; 16490.17,10455.13 cw(c16526.79,10413.6) 16509.71,10466.27 ; 16490.17,10455.13 cw(c16526.79,10413.6) 16509.71,10466.27 ; 16490.17,10455.13 cw(c16526.79,10413.6) 16509.71,10466.27 ; 16490.17,10455.13 cw(c16526.79,10413.6) 16509.71,10466.27 ; 16490.17,10455.13 cw(c16526.79,10413.6) 16509.71,10466.27 ; 16490.17,10455.13 cw(c16526.79,10413.6) 16509.71,10466.27 ; 16490.17,10455.13 cw(c16526.79,10413.6) 16509.71,10466.27 ; 16490.17,10455.13 cw(c16526.79,10413.6) 16509.71,10466.27 ; 16490.17,10455.13 cw(c16526.79,10413.6) 16509.71,10466.27 ; 16490.17,10455.13 cw(c16526.79,10413.6) 16509.71,10466.27 ; 16490.17,10455.13 cw(c16526.79,10413.6) 16509.71,10466.27 ; 16490.17,10455.13 cw(c16526.79,10413.6) 16509.71,10466.27 ; 16490.17,10455.13 cw(c16526.79,10413.6) 16509.71,10466.27 ; 16490.17,10455.13 cw(c16526.79,10413.6) 16509.71,10466.27 ; 16490.17,10455.13 cw(c16526.79,10413.6) 16509.71,10466.27 ; 16490.17,10455.13 cw(c16526.79,10413.6) 16509.71,10466.27 ; 16578.06,10488.58 ccw(c16567.09,10522.2) 16597.21,10503.67 ; 16578.06,10488.58 ccw(c16567.09,10522.2) 16597.21,10503.67 ; 16578.06,10488.58 ccw(c16567.09,10522.2) 16597.21,10503.67 ; 16578.06,10488.58 ccw(c16567.09,10522.2) 16597.21,10503.67 ; 16578.06,10488.58 ccw(c16567.09,10522.2) 16597.21,10503.67 ; 16578.06,10488.58 ccw(c16567.09,10522.2) 16597.21,10503.67 ; 16578.06,10488.58 ccw(c16567.09,10522.2) 16597.21,10503.67 ; 16578.06,10488.58 ccw(c16567.09,10522.2) 16597.21,10503.67 ; 16578.06,10488.58 ccw(c16567.09,10522.2) 16597.21,10503.67 ; 16578.06,10488.58 ccw(c16567.09,10522.2) 16597.21,10503.67 ; 16578.06,10488.58 ccw(c16567.09,10522.2) 16597.21,10503.67 ; 16578.06,10488.58 ccw(c16567.09,10522.2) 16597.21,10503.67 ; 16578.06,10488.58 ccw(c16567.09,10522.2) 16597.21,10503.67 ; 16578.06,10488.58 ccw(c16567.09,10522.2) 16597.21,10503.67 ; 16578.06,10488.58 ccw(c16567.09,10522.2) 16597.21,10503.67 ; 16578.06,10488.58 ccw(c16567.09,10522.2) 16597.21,10503.67
  Bottom 6+gnd w5: U2.33@16373.03,10236.22 v1@16373.03,10298.06